# Altium PCB PCB1.PcbDoc
Units mm, origin at the board's own origin, x right, y up, seen from the top; angles counter-clockwise.
Board outline 50.29 x 20.19 mm, 2 copper layers (Top Layer, Bottom Layer); 9 components, 6 nets, 39 pads, 0 vias.
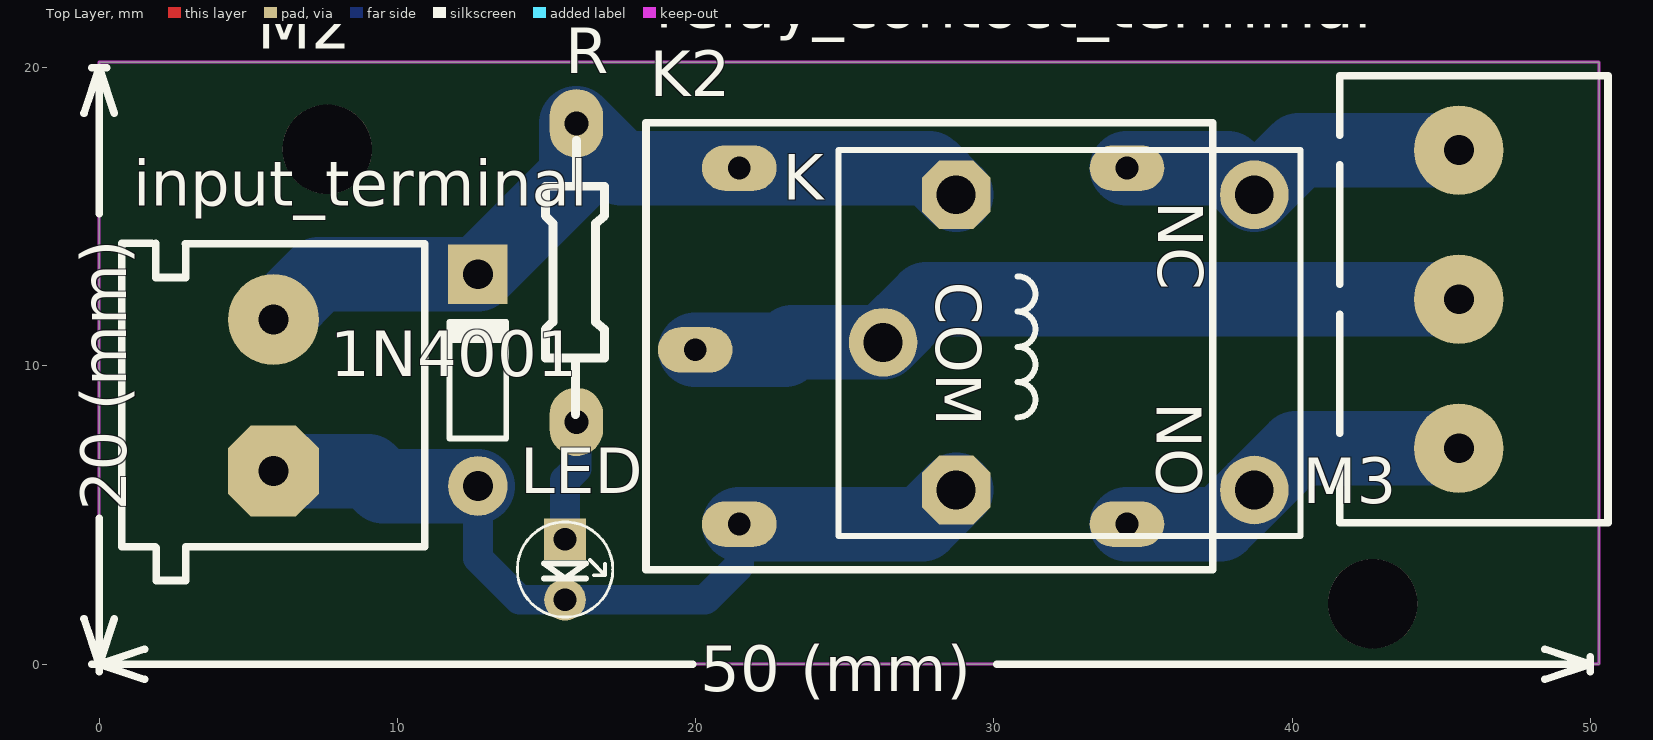
[diagram p0: Top Layer view]
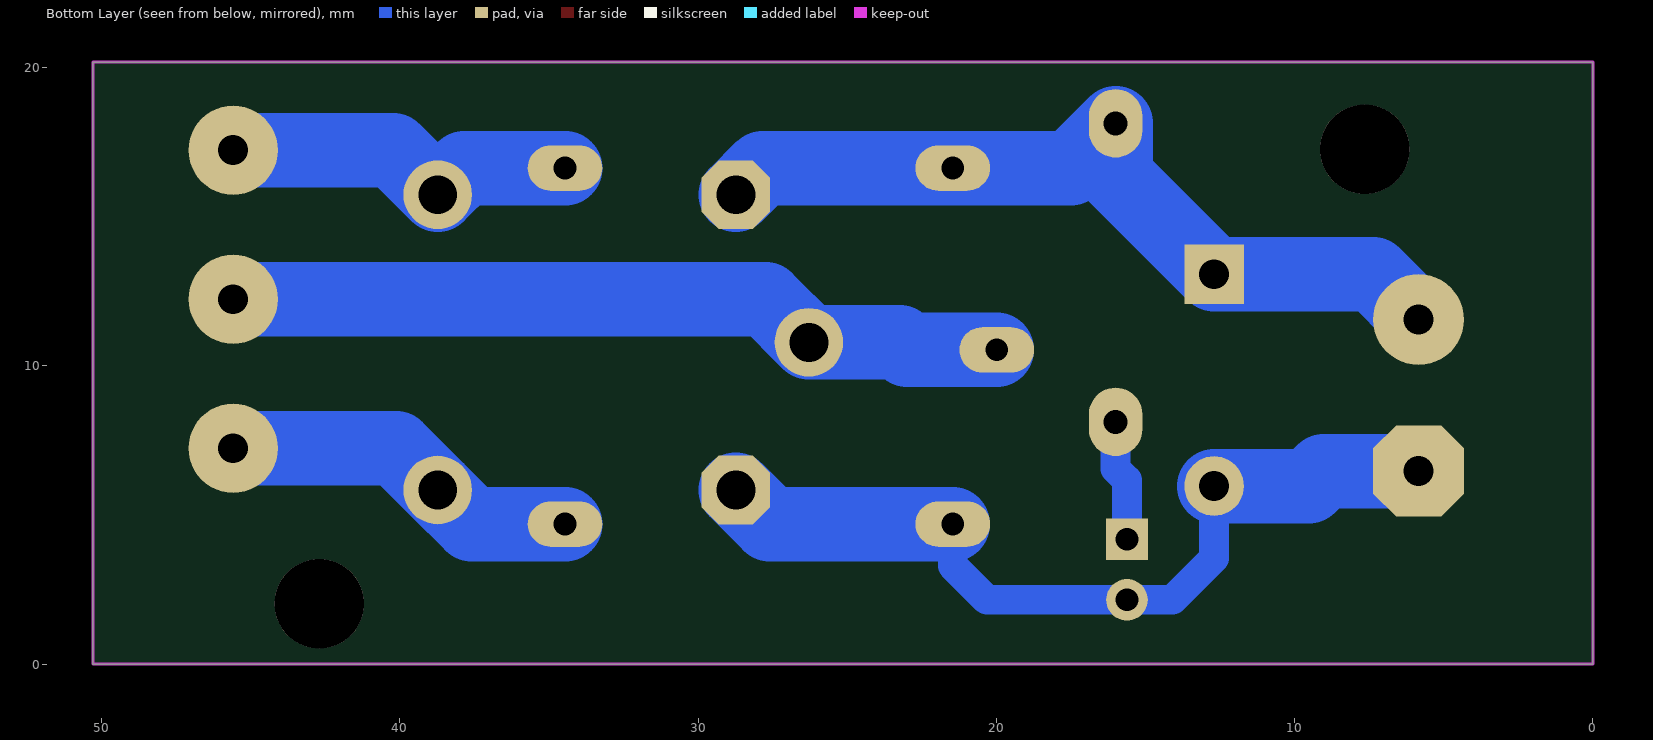
[diagram p1: Bottom Layer view, seen from below]

## Layer stack, top to bottom
Top Solder: solder mask 0.0102, Solder Resist, Dk 3.5
Top Layer: signal copper 0.05
Dielectric 1: dielectric 0.32, FR-4, Dk 4.8
Bottom Layer: signal copper 0.05
Bottom Solder: solder mask 0.0102, Solder Resist, Dk 3.5

## Board outline
0,0 50.292,0 50.292,20.193 0,20.193

## Design rules (kind name [scope] priority, off if disabled: settings)
Clearance [All] p1: gap=0.3 ignorepadtopadclearanceinfootprint=FALSE
DiffPairsRouting [All] p1: maxlimit=0.7 minlimit=0.3 mostfreqgap=0.5 toplayer_minwidth=0.381 toplayer_maxwidth=1 toplayer_prefwidth=0.5 bottomlayer_minwidth=0.381 bottomlayer_maxwidth=1 bottomlayer_prefwidth=0.5 maxuncoupledlength=12.7
HoleSize [All] p1: absolutevalues=TRUE maxlimit=1 minlimit=0.5 maxpercent=80.000 minpercent=20.000
HoleToHoleClearance [All] p1: gap=0.3 allowstackedmicrovias=TRUE
PolygonConnect [All] p1: connectstyle=Relief reliefconductorwidth=0.254 reliefentries=4 polygonreliefangle="90 Angle" airgapwidth=0.254
RoutingLayers [All] p1: top layer_v5=FALSE bottom layer_v5=TRUE
RoutingVias [All] p1: holewidth=0.711 width=1.27 viastyle="Through Hole" minholewidth=0.4 minwidth=1.27 maxholewidth=0.711 maxwidth=1.27
SolderMaskExpansion [All] p1: expansion=0.102
Width [All] p1: maxlimit=1 minlimit=0.3 preferedwidth=0.5
26 further rules are at their usual default settings.

## Classes and differential pairs
component class Sheet1: 1N4001 input_terminal K K2 LED M2 R relay_contoct_terminal

## Components (designator, comment, footprint, x,y, rotation, side; value= is the part's Value field where it differs from the comment)
1N4001 "Diode 1N4007 vertical" DO-35 12.7,9.525 r90 top
input_terminal "CON2 pin blue" My_CN2 0.749,3.95 r90 top
K "Relay" "Relay 15.40x12.10x13.10" 26.285,10.792 r270 top
K2 "Relay-05vDC" Relays 18.336,18.161 r270 top
LED "Red" LED-3mm 15.621,3.175 r270 top
M2 "Screw" "Board Screw_No Silk" 7.652,17.272 r0 top
M3 "Screw" "Board Screw_No Silk" 42.704,2.032 r0 top (schematic designator M2)
R "1K" AXIAL0.4 16.002,18.136 r270 top
relay_contoct_terminal "Terminal" "Terminal 1*3" 41.593,19.739 r270 top

## Footprints (in the part's own frame and the unit in brackets; to place one, negate y for a bottom-side part, rotate by r counter-clockwise, add the part's x,y. Pads: shape width x height; smd on the part's side, far side on the other; paste and mask are expansions set on the pad)
AXIAL0.4 [mm]
  oval 2.3x1.8 hole 0.8: 1(0,0) 2(10.008,0)
  silkscreen extent 0.58,-1.04 9.75,0.94
"Board Screw_No Silk" [mm]
  round 0.6 on Top Overlay: S(-2,0) S(-1.414,-1.414) S(-1.414,1.414) S(0,-2) S(0,2) S(1.414,-1.414) S(1.414,1.414) S(2,0)
  round 3 hole 3 mask+0.1: S(0,0)
DO-35 [mm] "Diode, Axial; Body 3.8 x 1.9 mm (LxDia. max), Lead Dia. 0.53 mm (max)"
  round 2 hole 1: 1(-3.55,0)
  rect 2x2 hole 1: 2(3.55,0)
  silkscreen extent -1.95,-0.95 2.05,0.95
LED-3mm [mil]
  rect 55x55 hole 30: 1(-40,0)
  round 55 hole 30: 2(40,0)
  silkscreen extent -63,-63 63,63, body extent -69,-69 69,69, height 154
My_CN2 [mil]
  oct 120x120 hole 39.37: 1(99.5,-200.5)
  round 120 hole 39.37: 2(299.5,-200.5)
  silkscreen extent -45,-400 400,0
"Relay 15.40x12.10x13.10" [mm]
  round 2.3 hole 1.3: 1(0,0) 2(-4.95,12.45) 3(4.95,12.45)
  oct 2.3x2.3 hole 1.3: 4(-4.95,2.45) 5(4.95,2.45)
  silkscreen extent -6.45,-1.5 6.5,14, body extent -6.05,-1.3 6.05,14, height 15.6
Relays [mil]
  oval 60x98.43 hole 30: 1(300,65) 2(60,635) 3(530,635) 4(60,123.11) 5(530,123.11)
  silkscreen extent 0,0 591,748
"Terminal 1*3" [mm]
  round 3 hole 1: 1(2.5,4) 2(7.5,4) 3(12.5,4)
  silkscreen extent 0,0 15,9

## Part data
1N4001: "1 Amp General Purpose Rectifier", Publisher="seyed mohsen ghasemian"
input_terminal: "Connector blue screw"
K: "SPDT Relay", Company=E.P.I.L, Design_Date=2011/10/31, Designer="Eng. Saeid Jorablo"
K2: "Relay-05vDC-240AC 5A", ComponentLinkURL=www.picpars.com, Designer="Seyed Mohsen Ghasemain"
LED: library part LED, "LED", Adding Date=1387/12/22, Color=Red, Designer="Saeid Jorablo", Organazation=ControTec, Size=3mm
M2 M3: library part "Board Screw", "Board Screw With Spacer"
R: library part Res3, "Resistor", LatestRevisionDate=29-May-2009, LatestRevisionNote="IPC-7351 Footprint Added.", PackageDescription="Chip Resistor", PackageReference=J1-0603, Published=8-Jun-2000, Publisher="Altium Limited"
relay_contoct_terminal: library part "Terminal 1*3", "Terminal 3 Pin 250VAC 16A", ComponentLinkURL=www.picpars.com, Designer="Seyed Mohsen Ghasemain", E-mail=picpars@gmail.com

## Nets (pads, with @x,y where several pads share a name; then routed paths per layer and width w, separated by ;. In a path a pad name is that pad's centre, name@x,y a point inside that pad or via, vN(x,y) a via of type N, cw(c..) or ccw(c..) an arc to the next point about the centre after c; other vN are vias at no path point)
GND: 1N4001.1 input_terminal.1 K2.5 K.5 LED.2 | length 28.4
  Bottom Layer w1: 1N4001.1 12.7,3.556 14.097,2.159 LED.2 20.32,2.159 21.463,3.302 K2.5
  Bottom Layer w2.5: input_terminal.1 9.017,6.477 9.519,5.975 1N4001.1 ; K2.5 27.592,4.699 K.5
NetK2_1: K2.1 K.1 relay_contoct_terminal.2 | length 26.3
  Bottom Layer w0.5: 22.987,10.541 23.238,10.792
  Bottom Layer w2.5: K2.1 22.987,10.541 ; 23.238,10.792 K.1 27.732,12.239 relay_contoct_terminal.2
NetK2_2: K2.2 K.2 relay_contoct_terminal.1 | length 12.1
  Bottom Layer w2.5: K2.2 37.84,16.637 K.2 40.232,17.239 relay_contoct_terminal.1
NetK2_3: K2.3 K.3 relay_contoct_terminal.3 | length 12.2
  Bottom Layer w2.5: K2.3 37.592,4.699 K.3 40.132,7.239 relay_contoct_terminal.3
NetLED_1: LED.1 R.2 | length 4.1
  Bottom Layer w1: LED.1 15.621,6.172 16.002,6.553 R.2
VCC: 1N4001.2 input_terminal.2 K2.4 K.4 R.1 | length 27.6
  Bottom Layer w2.5: input_terminal.2 7.36,13.075 1N4001.2 16.002,16.377 R.1 17.501,16.637 K2.4 27.84,16.637 K.4
pads on no net: M2.S M3.S

## Keep-outs
Keep-Out Layer:
  the board outline again, w0.1

## Silkscreen, mask and mechanical layers (free items; w line width, h text height)
Top Overlay:
  lines w0.254: -0.508,1.524 0,0 ; -0.508,18.476 0,20 ; -0.254,0 0.254,0 ; -0.254,20 0.254,20 ; 0,-0.254 0,0.254 ; 0,4.896 0,0 ; 0,15.104 0,20 ; 0.508,1.524 0,0 ; 0.508,18.476 0,20 ; 1.524,-0.508 0,0 ; 1.524,0.508 0,0 ; 19.896,0 0,0 ; 30.104,0 50,0 ; 48.476,-0.508 50,0 ; 48.476,0.508 50,0 ; 50,-0.254 50,0.254
  text "20 (mm)" at 0.914,5.15 h1.52 r90
  text "50 (mm)" at 20.15,-0.914 h1.52

## Text inside footprints (layer, text, board x,y; h text height)
K: Top Overlay "NC" at 35.505,15.516 h1.5 r270; Top Overlay "NO" at 35.454,8.785 h1.5 r270; Top Overlay "COM" at 28.063,12.824 h1.5 r270